# EAGLE board Generador de Funciones v1 (EAGLE 9.0.1)
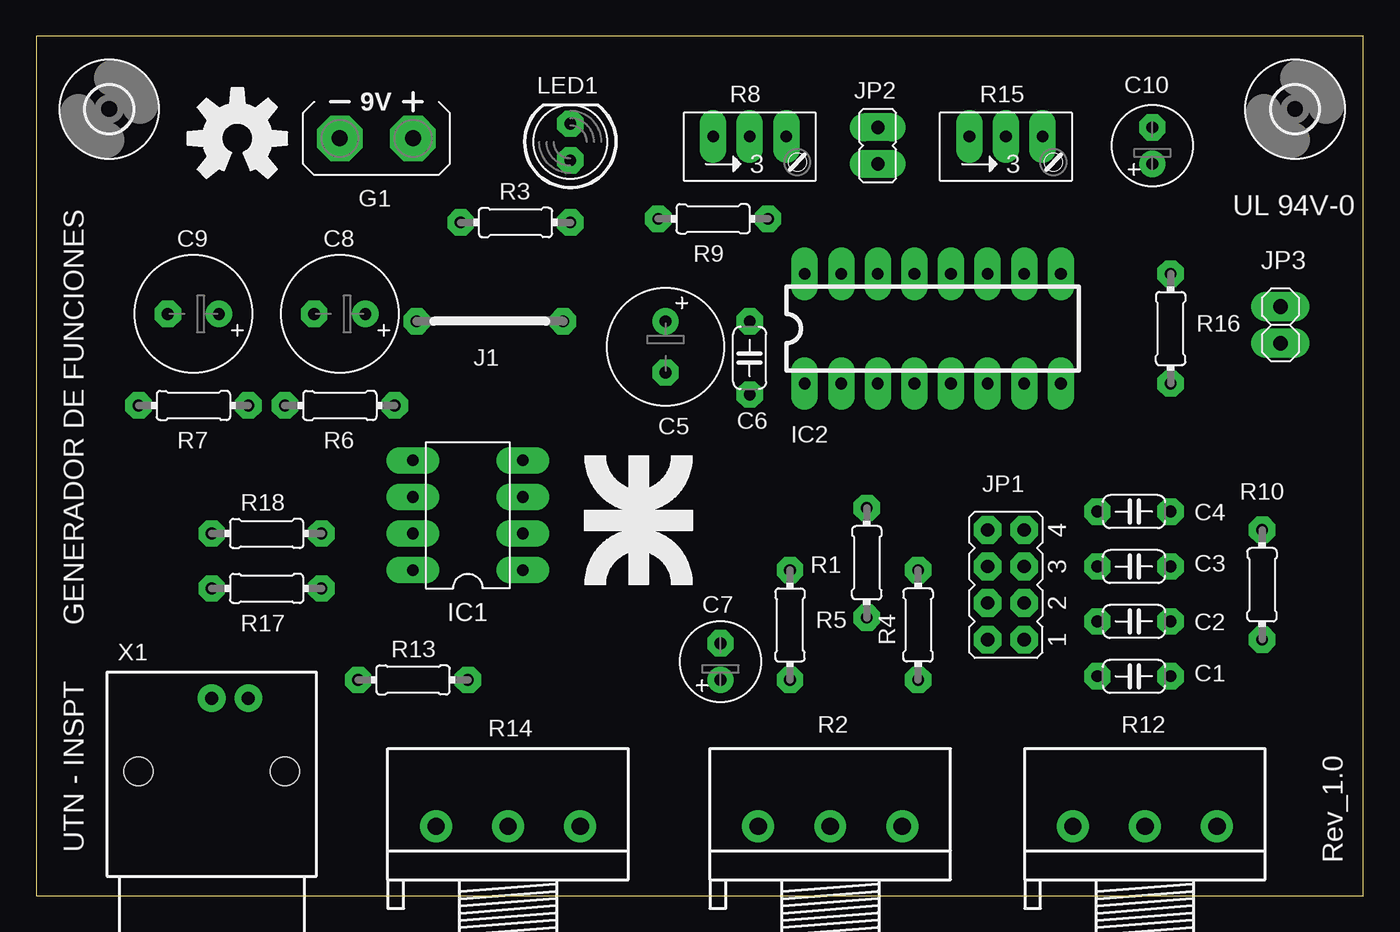
[diagram p0: board, top side]
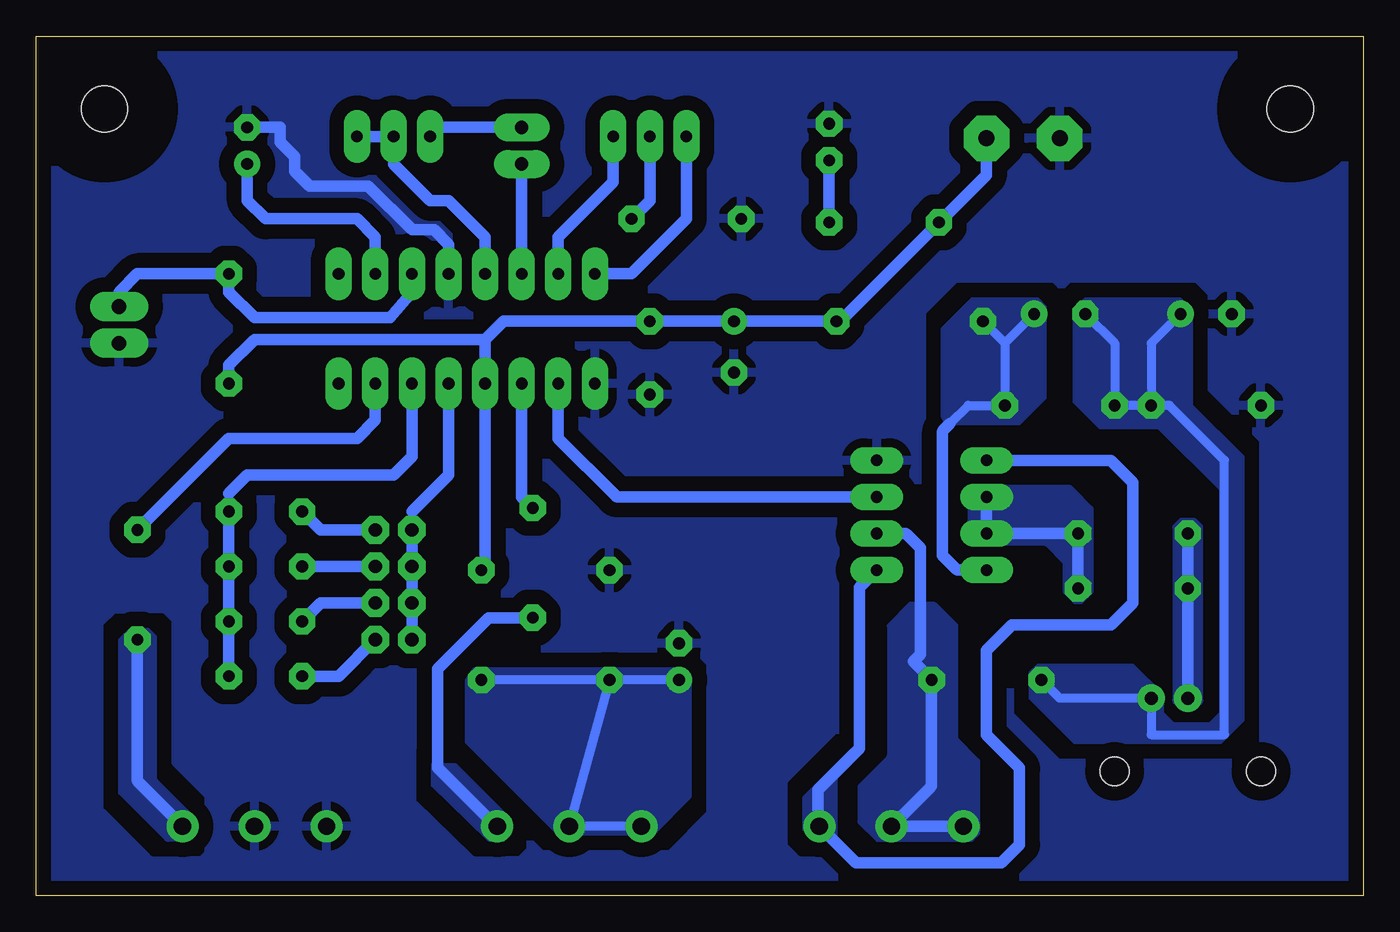
[diagram p1: board, bottom side, seen from below]

Size 92.13 x 59.68 mm. Coordinates in mm from the lower left corner, seen from the top.
Outline: 0,0 92.13,0 92.13,59.68 0,59.68 0,0
Copper layers (1*16): Top 0.035mm / dielectric 1.5mm / Bottom 0.035mm
Design rules "default *": minimum track width 24mil, minimum drill 0.35mm, track to track 6mil, track to pad 6mil, pad to pad 6mil, via to via 6mil, smd to smd 6mil, copper to edge 40mil, drill to drill 24mil, minimum pad ring 20mil, minimum via ring 20mil, stop-mask expansion 4mil, vias tented up to drill 0mil, thermal gap 24mil

## Footprints (pad centres in the part's own frame; a part is rotated, then mirrored left to right if it is on the bottom)
C050-024X044 = drill 0.813 octagon: 1 -2.54,0; 2 2.54,0
E3,5-8 = drill 0.813 pad 1.6: + -1.778,0 | drill 0.813 pad 1.6 octagon: - 1.778,0
E2,5-6 = drill 0.813 pad 1.6: + -1.27,0 | drill 0.813 pad 1.6 octagon: - 1.27,0
AB9V = drill 1.118 pad 3.15 octagon: + 0,2.54; - 0,-2.54
DIL08 = drill 0.813 long: 1 -3.81,-3.81; 2 -1.27,-3.81; 3 1.27,-3.81; 4 3.81,-3.81; 5 3.81,3.81; 6 1.27,3.81; 7 -1.27,3.81; 8 -3.81,3.81
DIL16 = drill 0.813 long: 1 -8.89,-3.81; 2 -6.35,-3.81; 3 -3.81,-3.81; 4 -1.27,-3.81; 5 1.27,-3.81; 6 3.81,-3.81; 7 6.35,-3.81; 8 8.89,-3.81; 9 8.89,3.81; 10 6.35,3.81; 11 3.81,3.81; 12 1.27,3.81; 13 -1.27,3.81; 14 -3.81,3.81; 15 -6.35,3.81; 16 -8.89,3.81
10 = drill 0.813 pad 1.6 octagon: 1 -5.08,0; 2 5.08,0
JP4Q = drill 0.914 octagon: 1 -3.81,-1.27; 2 -3.81,1.27; 3 -1.27,-1.27; 4 -1.27,1.27; 5 1.27,-1.27; 6 1.27,1.27; 7 3.81,-1.27; 8 3.81,1.27
JP1 = drill 0.914 long: 1 0,-1.27; 2 0,1.27
1X02 = drill 1.016 long: 1 -1.27,0; 2 1.27,0
LED5MM = drill 0.813 octagon: A -1.27,0; K 1.27,0
0204/7 = drill 0.813 octagon: 1 -3.81,0; 2 3.81,0
3RP/1610N = drill 1.2 pad 2.184: 1 -5,0; 2 0,0; 3 5,0
RJ9W = drill 0.813 long: A 2.54,0.635; E -2.54,0.635; S 0,0.635
3,2 = hole 3.2: 0,0
AMP_227161 = drill 0.9 pad 1.27: 1 0,-5.08; 2 -2.54,-5.08 | hole 2: -5.08,0; 5.08,0

## Placement (x,y rotation side)
C1  1u  [C050-024X044]  76.2,15.24 0 top
C2  100n  [C050-024X044]  76.2,19.05 0 top
C3  10n  [C050-024X044]  76.2,22.86 0 top
C4  1n  [C050-024X044]  76.2,26.67 0 top
C5  470u  [E3,5-8]  43.69,38.1 270 top
C6  100n  [C050-024X044]  49.53,37.34 270 top
C7  10u  [E2,5-6]  47.5,16.26 90 top
C8  220u  [E3,5-8]  21.08,40.39 180 top
C9  220u  [E3,5-8]  10.92,40.39 180 top
C10  1u  [E2,5-6]  77.47,52.07 90 top
G1  AB9V  [AB9V]  23.62,52.58 270 top
IC1  LM358N  [DIL08]  29.97,26.42 90 top
IC2  XR2206  [DIL16]  62.23,39.37 0 top
J1  J10MM  [10]  31.5,39.88 180 top
JP1  [JP4Q]  67.31,21.59 90 top
JP2  [JP1]  58.42,52.07 180 top
JP3  [1X02]  86.36,39.62 270 top
LED1  [LED5MM]  37.08,52.32 90 top
R1  10R  [0204/7]  57.66,23.11 90 top
R2  10k  [3RP/1610N]  55.12,4.83 0 top
R3  1k  [0204/7]  33.27,46.74 0 top
R4  10k  [0204/7]  61.21,18.8 90 top
R5  10k  [0204/7]  52.32,18.8 270 top
R6  1k  [0204/7]  21.08,34.04 180 top
R7  1k  [0204/7]  10.92,34.04 180 top
R8  25k  [RJ9W]  49.53,52.07 0 top
R9  1k  [0204/7]  46.99,46.99 180 top
R10  3k3  [0204/7]  85.09,21.59 90 top
R12  100k  [3RP/1610N]  76.96,4.83 0 top
R13  10k  [0204/7]  26.16,14.99 0 top
R14  25k  [3RP/1610N]  32.77,4.83 0 top
R15  500R  [RJ9W]  67.31,52.07 0 top
R16  10k  [0204/7]  78.74,39.37 270 top
R17  100  [0204/7]  16,21.34 180 top
R18  100  [0204/7]  16,25.15 180 top
U$1  UTN_LOGO_0  [UTN_LOGO_0_TOP]  37.34,21.59 0 top
U$2  [3,2]  5.08,54.61 0 top
U$3  [3,2]  87.38,54.61 0 top
U$4  OSHW-LOGOL  [OSHW-LOGO-L]  13.97,52.58 0 top
X1  1-227161-0  [AMP_227161]  12.19,8.64 180 top

## Library data of the parts
C1-C10 = rcl; SPICEPREFIX: C
G1 = battery
IC1 = linear
IC2 = SparkFun
J1 JP1 JP2 = jumper
JP3 = pinhead
LED1 = led
R1 R3-R7 R9 R10 R13 R16-R18 = rcl; SPICEPREFIX: R
R2 R8 R12 R14 R15 = pot
U$1 = UTN_LOGO
U$2 U$3 = holes
U$4 = SparkFun-Aesthetics
X1 = con-coax; MF: TYCO ELECTRONICS; MPN: 1-227161; OC_FARNELL: unknown; OC_NEWARK: 33B3200

## Nets
A_OUT: IC1.3 IC2.2
AGND: C8.- C9.+ R6.2 R7.1 R13.1 X1.2
AMP: IC2.3 R1.2
CAP_1: IC2.5 JP1.2 JP1.4 JP1.6 JP1.8
CAP_2: C1.2 C2.2 C3.2 C4.2 IC2.6
DIST_1: IC2.14 JP2.2
DIST_2: IC2.13 R15.A R15.S
FREQ: IC2.7 R10.2
GND: C5.- C6.2 C7.- C9.- C10.- G1.- IC1.4 IC2.1 IC2.12 JP3.2 LED1.K R5.1 R7.2 R9.2 R12.1 R12.2
N$1: IC1.2 R13.2 R14.1 R14.2
N$2: R1.1 R2.3
N$3: R10.1 R12.3
N$5: C1.1 JP1.1
N$6: C2.1 JP1.3
N$7: C10.+ IC2.10
N$8: R8.S R9.1
N$9: C3.1 JP1.5
N$10: C4.1 JP1.7
N$11: R17.2 R18.2 X1.1
N$12: LED1.A R3.2
N$13: JP2.1 R15.E
N$15: C7.+ R2.1 R2.2 R4.1 R5.2
N$16: IC1.1 IC1.5 R14.3
N$17: IC1.6 IC1.7 R17.1 R18.1
N$18: C8.+ IC1.8 J1.2 R6.1
SIM_1: IC2.16 R8.E
SIM_2: IC2.15 R8.A
SQRT: IC2.11 JP3.1 R16.1
VCC: C5.+ C6.1 G1.+ IC2.4 J1.1 R3.1 R4.2 R16.2

## Tracks (layer width: path | path; a pad name or v marks a point on that pad's centre or on a via)
A_OUT
  Bottom 0.813: IC2.2 55.88,31.75 51.89,27.76 | 51.71,27.69 arc45 51.89,27.76 | IC1.3 51.71,27.69 | 51.71,27.69 arc45 51.89,27.76
AGND
  Bottom 0.61: R13.1 21.08,13.72 X1.2 14.73,11.18 9.65,11.18 9.65,30.23 13.46,34.04 R7.1 | R7.1 R6.2 17.27,38.35 C8.- | C9.+ 14.73,38.35 R7.1
  pour Bottom (no thermals): 11.94,40.64 11.94,34.04 8.38,30.48 8.38,12.19 9.91,10.67 20.07,10.67 23.11,13.72 23.11,15.49 22.61,16 16,16 13.97,13.97 13.97,12.7 13.21,11.94 10.67,11.94 9.91,12.7 9.91,28.19 14.22,32.51 18.29,32.51 20.07,34.29 20.07,40.64 19.3,41.4 12.7,41.4
AMP
  Bottom 0.813: IC2.3 58.42,27.69 R1.2
CAP_1
  Bottom 0.61: 66.04,26.67 JP1.8
  Bottom 0.813: JP1.8 JP1.6 JP1.4 JP1.2 | IC2.5 63.5,29.21 66.04,26.67
CAP_2
  Bottom 0.61: 78.74,27.94 C4.2
  Bottom 0.813: C4.2 C3.2 C2.2 C1.2 | IC2.6 66.04,30.48 67.31,29.21 77.47,29.21 78.74,27.94
DIST_1
  Bottom 0.813: JP2.2 IC2.14
DIST_2
  Bottom 0.61: 67.31,50.8 R15.S
  Bottom 0.813: IC2.13 60.96,45.72 63.5,48.26 64.77,48.26 67.31,50.8 | R15.S R15.A
FREQ
  Bottom 0.813: IC2.7 68.58,33.02 69.85,31.75 78.74,31.75 R10.2
GND
  Bottom 0.813: IC2.12 63.5,45.21 64.52,46.23 66.04,46.23 69.09,49.28 73.15,49.28 74.17,50.29 74.17,51.31 75.18,52.32 75.18,53.34 C10.-
  pour Bottom (isolate 1.016, rank 6): -5.08,63.5 96.27,63.5 96.27,-5.08 -5.08,-5.08
N$1
  Bottom 0.813: R14.1 R14.2 30.05,7.55 arc-45 29.97,7.72 R13.2 31.24,16.26 30.81,16.69 arc-45 30.73,16.87 30.73,24.13 31.68,25.07 arc-45 31.86,25.15 IC1.2
  pour Bottom (no thermals): 33.78,3.81 27.28,3.81 arc-45 27.1,3.88 26.67,4.32 26.67,9.29 arc-45 26.74,9.47 28.19,10.92 28.19,18.8 29.64,20.25 arc-45 29.82,20.32 31.5,20.32 32.95,18.87 arc-45 33.02,18.69 33.02,9.76 arc45 33.09,9.58 35.05,7.62 35.05,5.19 arc-45 34.98,5.01
N$2
  Bottom 0.61: 60.2,4.91 R2.3 60.2,4.83
  Bottom 0.813: 60.2,4.83 64.26,8.89 64.26,15.75 60.71,19.3 R1.1
  pour Bottom (no thermals): 59.69,3.81 60.6,3.81 arc45 60.78,3.88 64.64,7.62 64.64,9.14 63.1,9.14 arc45 62.92,9.07 59.18,5.33 59.18,4.42 arc45 59.26,4.24
N$3
  Bottom 0.813: R10.1 85.09,8.06 arc-45 85.02,7.88 R12.3
  pour Bottom (no thermals): 82.04,3.81 82.95,3.81 arc45 83.13,3.88 86.36,7.11 86.36,17.67 arc45 86.29,17.85 85.6,18.54 84.43,18.54 arc45 84.25,18.47 83.82,18.03 83.82,8.23 arc-45 83.75,8.05 81.53,5.84 81.53,4.17 arc45 81.61,3.99 81.79,3.81
N$5
  Bottom 0.813: JP1.1 71.12,15.24 C1.1
N$6
  Bottom 0.813: JP1.3 72.39,20.32 C2.1
N$7
  Bottom 0.813: IC2.10 68.58,45.72 69.85,46.99 76.2,46.99 77.47,48.26 C10.+
N$8
  Bottom 0.813: R8.S 49.53,48.26 R9.1
N$9
  Bottom 0.813: JP1.5 C3.1
N$10
  Bottom 0.813: JP1.7 72.39,25.4 C4.1
N$11
  Bottom 0.813: X1.1 R17.2 R18.2
  pour Bottom (no thermals): 11.68,12.95 11.25,13.39 arc-45 11.18,13.57 11.18,25.65 11.61,26.09 arc-45 11.79,26.16 12.7,26.16 13.13,25.73 arc-45 13.21,25.55 13.21,25.4 13.21,13.57 arc-45 13.13,13.39 12.7,12.95
N$12
  Bottom 0.813: LED1.A R3.2
N$13
  Bottom 0.813: JP2.1 64.14,53.34 R15.E
N$15
  Bottom 0.61: R2.1 R2.2 R5.2 | R5.2 R4.1 | C7.+ R5.2
  pour Bottom (no thermals): 49.28,4.32 46.74,6.86 46.74,14.99 47.5,15.75 61.72,15.75 62.23,14.99 62.23,10.67 55.88,4.32
N$16
  Bottom 0.813: IC1.5 17.53,30.23 16,28.7 16,20.32 17.53,18.8 24.38,18.8 26.16,17.02 26.16,11.18 23.95,8.96 arc45 23.88,8.79 23.88,3.56 25.15,2.29 35.23,2.29 R14.3 R14.3 arc45 37.85,5.01 37.85,7.37 35.05,10.17 arc-45 34.97,10.35 34.97,21.42 IC1.1
  pour Bottom (no thermals): 36.83,3.81 37.99,3.81 arc45 38.17,3.88 38.86,4.57 38.86,6.75 arc45 38.79,6.93 35.56,10.16 35.56,9.25 arc45 35.63,9.07 36.58,8.13 36.58,4.17 arc45 36.65,3.99
N$17
  Bottom 0.813: R17.1 R18.1 IC1.7 IC1.6
  pour Bottom (no thermals): 18.8,21.08 18.8,26.82 arc-45 18.87,27 20.07,28.19 20.25,28.37 arc-45 20.43,28.45 26.16,28.45 26.82,28.45 arc-45 27,28.37 27.43,27.94 27.43,25 arc-45 27.36,24.82 26.92,24.38 22.2,24.38 arc45 22.02,24.31 20.83,23.11 20.83,21.19 arc-45 20.75,21.01 20.07,20.32 19.66,20.32 arc-45 19.48,20.39
N$18
  Bottom 0.61: C8.+ 24.89,38.35 | 24.89,38.35 R6.1 27.43,34.04 28.7,32.77 | J1.2 24.89,38.35
  Bottom 0.813: IC1.8 28.09,22.61 arc45 28.27,22.68 29.21,23.62 29.21,32.15 arc45 29.14,32.33 28.7,32.77
  pour Bottom (no thermals): 22.1,34.54 22.1,40.89 22.61,41.4 27.18,41.4 29.21,39.37 29.21,33.27 28.96,32.77 23.88,32.77
SIM_1
  Bottom 0.813: IC2.16 50.8,43.18 46.99,46.99 R8.E
SIM_2
  Bottom 0.813: R8.A 52.07,49.53 55.88,45.72 IC2.15
SQRT
  Bottom 0.61: IC2.11 66.04,41.91
  Bottom 0.813: 66.04,41.91 67.56,40.13 76.96,40.13 78.74,41.91 R16.1 85.09,43.18 86.36,41.91 JP3.1
VCC
  Bottom 0.813: 60.96,38.61 IC2.4 60.96,22.86 R4.2 | 60.96,38.61 59.69,39.88 C6.1 C5.+ J1.1 | R16.2 78.74,36.83 76.96,38.61 60.96,38.61 | J1.1 36.83,39.37 | G1.+ 26.16,50.14 arc45 26.24,49.96 R3.1 36.5,39.7 arc-45 36.58,39.52 J1.1

## Text on the board
tNames: UL 94V-0 | GENERADOR DE FUNCIONES | UTN - INSPT | Rev_1.0